# EAGLE board RAUPS (EAGLE 7.2.0)
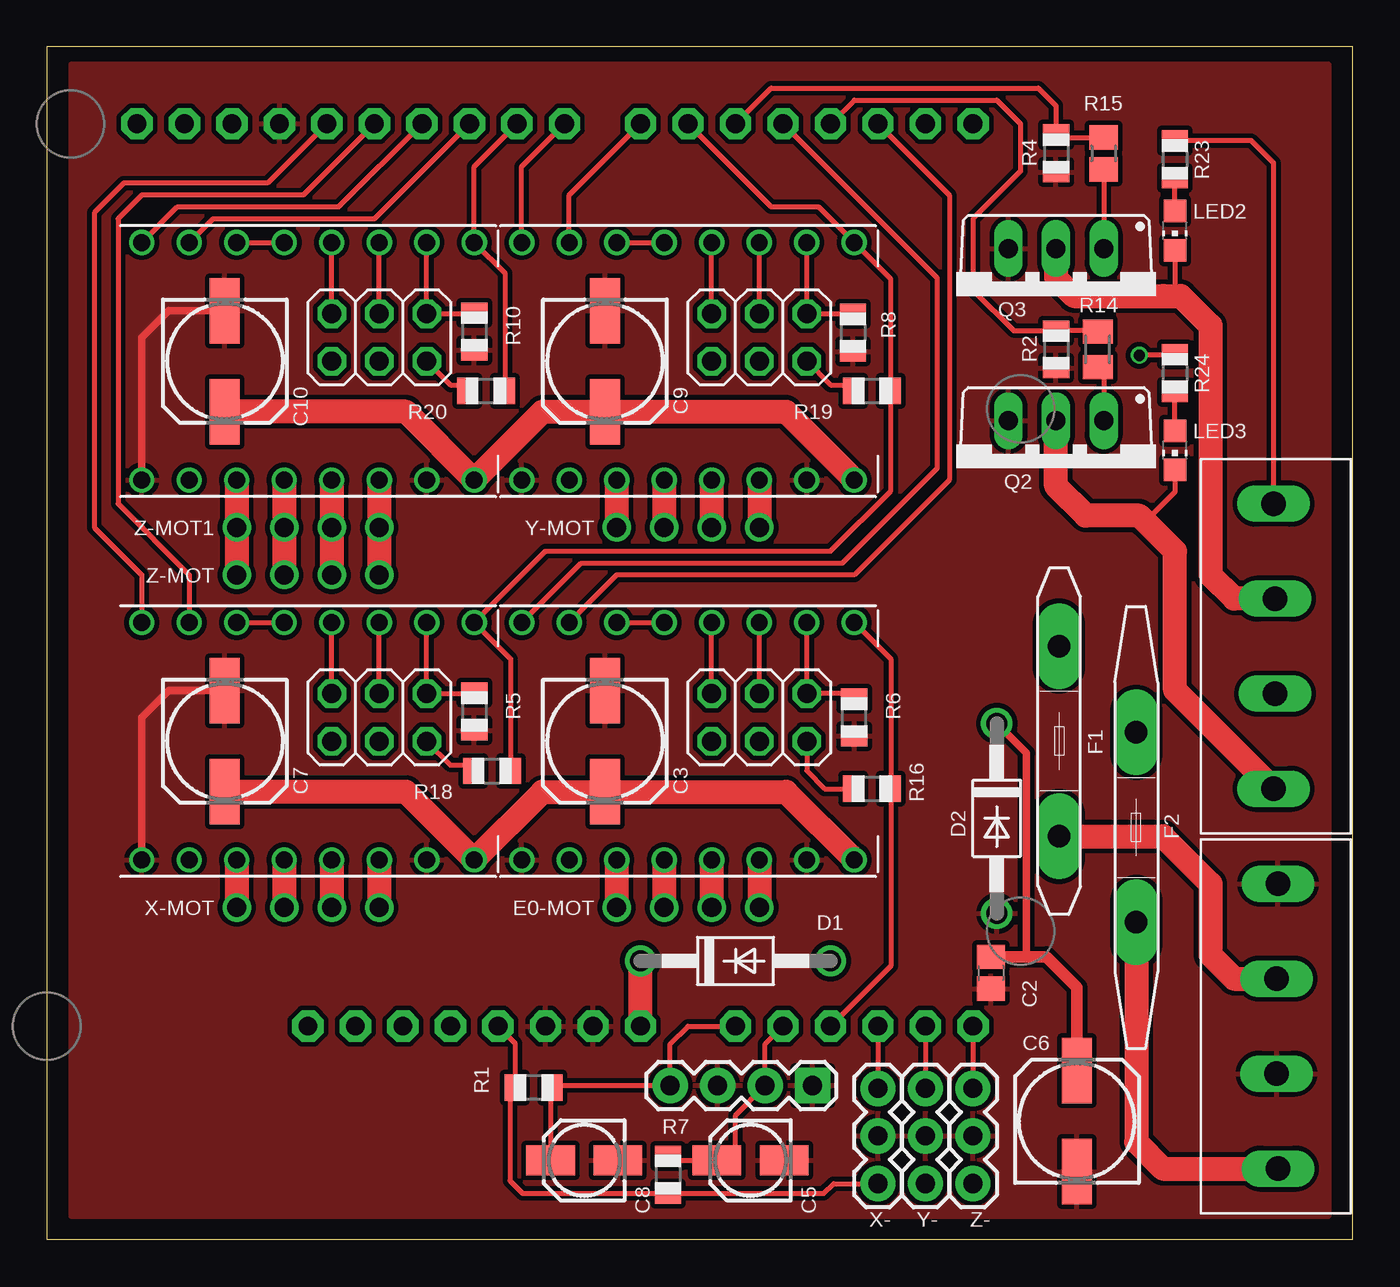
[diagram p0: board, top side]
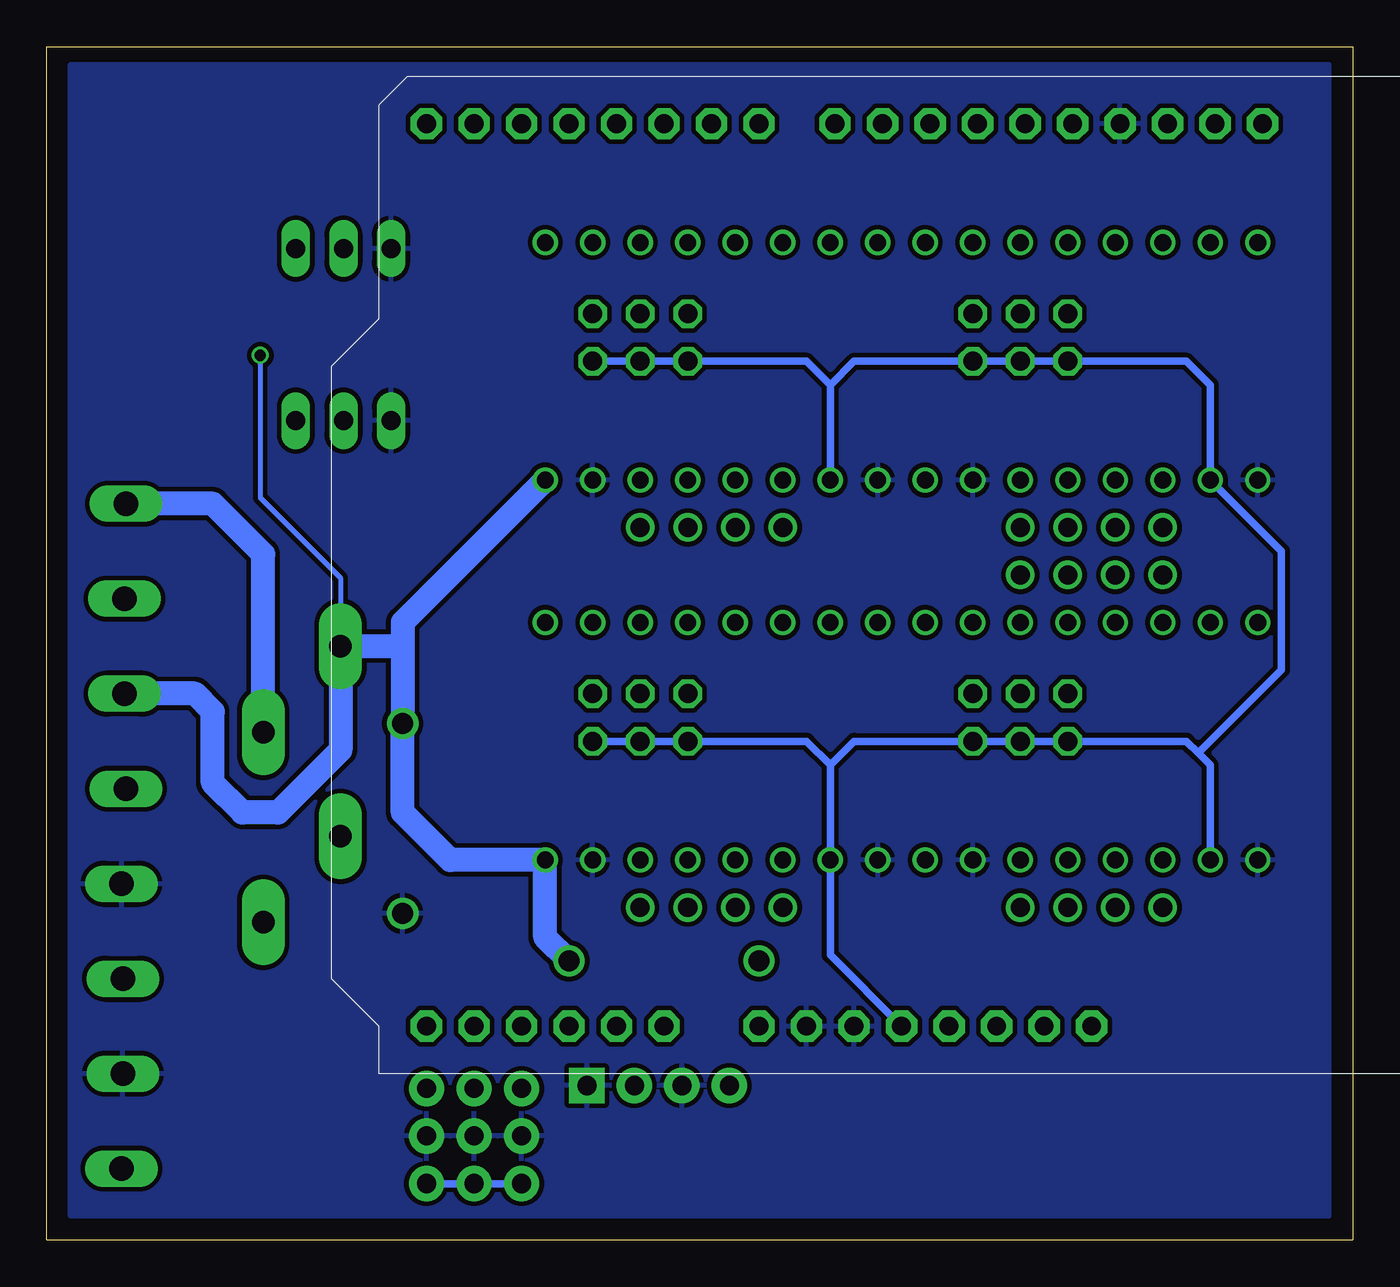
[diagram p1: board, bottom side, seen from below]

Size 69.84 x 63.81 mm. Coordinates in mm from the lower left corner, seen from the top.
Outline: 69.84,0 69.84,63.81 0,63.81 0,0 69.84,0
Copper layers (1*16): Top 0.035mm / dielectric 1.6mm / Bottom 0.035mm
Design rules "Elecrow_2-layer_PCB_eagle_rule": minimum track width 6mil, minimum drill 12mil, track to track 6mil, track to pad 6mil, pad to pad 6mil, via to via 8mil, smd to smd 0mil, copper to edge 20mil, drill to drill 10mil, minimum pad ring 6mil, minimum via ring 6mil, stop-mask expansion 0mil, vias tented up to drill 100mil, thermal gap 10mil

## Footprints (pad centres in the part's own frame; a part is rotated, then mirrored left to right if it is on the bottom)
C0805 = smd 1.3 x 1.5: 1 -0.85,0; 2 0.85,0
153CLV-0605 = smd 3.5 x 1.6: + 2.7,0; - -2.7,0
153CLV-0405 = smd 2.6 x 1.6: + 1.8,0; - -1.8,0
DO41-10 = drill 1.118: A 5.08,0; C -5.08,0
A4988BREAKOUT = drill 0.9: 1A 8.89,1.27; 1B 11.43,1.27; 2A 6.35,1.27; 2B 3.81,1.27; DIR 16.51,-11.43; EN -1.27,-11.43; GND 16.51,1.27; GND@0 1.27,1.27; MS1 1.27,-11.43; MS2 3.81,-11.43; MS3 6.35,-11.43; RST 8.89,-11.43; SLP 11.43,-11.43; STEP 13.97,-11.43; VDD 13.97,1.27; VMOT -1.27,1.27
1X04 = drill 1.016: 1 -2.54,0; 2 0,0; 3 2.54,0; 4 5.08,0
MFR500 = drill 1.2 pad 2.3 long: 1 -5.08,0; 2 5.08,0
MFR1100 = drill 1.2 pad 2.3 long: 1 -5.08,0; 2 5.08,0
1X04' = drill 1.016 pad 1.88 square: 1 0,0 | drill 1.016 pad 1.88: 2 2.54,0; 3 5.08,0; 4 7.62,0
2X03 = drill 1.016 octagon: 1 -2.54,-1.27; 2 -2.54,1.27; 3 0,-1.27; 4 0,1.27; 5 2.54,-1.27; 6 2.54,1.27
CHIP-LED0805 = smd 1.2 x 1.2: A 0,-1.05; C 0,1.05
TO220BV = drill 1.016 long: D 0,-2.54; G -2.54,-2.54; S 2.54,-2.54
R0805 = smd 1.1 x 1.4: 1 -1,0; 2 1,0
M0805 = smd 1.3 x 1.6: 1 -0.95,0; 2 0.95,0
R0805' = smd 1.3 x 1.5: 1 -0.85,0; 2 0.85,0
ARDUINOR3-BPLACE = drill 1 pad 1.676 octagon: 3V 35.56,2.54; 5V 38.1,2.54; A0 50.8,2.54; A1 53.34,2.54; A2 55.88,2.54; A3 58.42,2.54; A4 60.96,2.54; A5 63.5,2.54; AREF 23.876,50.8; D0 63.5,50.8; D1 60.96,50.8; D2 58.42,50.8; D3 55.88,50.8; D4 53.34,50.8; D5 50.8,50.8; D6 48.26,50.8; D7 45.72,50.8; D8 41.656,50.8; D9 39.116,50.8; D10 36.576,50.8; D11 34.036,50.8; D12 31.496,50.8; D13 28.956,50.8; GND 26.416,50.8; GND1 43.18,2.54; GND2 40.64,2.54; IOREF 30.48,2.54; RESERVED 27.94,2.54; RESET 33.02,2.54; SCL 18.796,50.8; SDA 21.336,50.8; VIN 45.72,2.54
CONN-4PIN = drill 1.3 long: P1 -7.62,-0.12; P2 -2.54,-0.04; P3 2.54,-0.04; P4 7.62,-0.12
1X03 = drill 1.016 pad 1.88: 1 0,0; 2 2.54,0; 3 5.08,0

## Placement (x,y rotation side)
C2  100nF  [C0805]  50.48,14.29 270 top
C3  100uF  [153CLV-0605]  29.84,26.67 270 top
C5  10uF  [153CLV-0405]  37.63,4.25 180 top
C6  100uF  [153CLV-0605]  55.09,6.35 90 top
C7  100uF  [153CLV-0605]  9.53,26.67 270 top
C8  10uF  [153CLV-0405]  28.74,4.25 180 top
C9  100uF  [153CLV-0605]  29.84,46.99 270 top
C10  100uF  [153CLV-0605]  9.53,46.99 270 top
D1  1N4004  [DO41-10]  36.83,14.92 0 top
D2  1N4004  [DO41-10]  50.8,22.54 270 top
E0-DRIVE  POLOLU_A4983CARRIER  [A4988BREAKOUT]  41.91,21.59 180 top
E0-MOT  [1X04]  35.56,17.78 180 top
F1  MFR500  [MFR500]  54.13,26.67 270 top
F2  MFR1100  [MFR1100]  58.26,22.07 90 top
JP1  [1X04']  40.96,8.26 180 top
JP2  [2X03]  38.1,27.94 180 top
JP4  [2X03]  17.78,27.94 180 top
JP5  [2X03]  38.1,48.26 180 top
JP6  [2X03]  17.78,48.26 180 top
LED2  [CHIP-LED0805]  60.33,53.98 180 top
LED3  [CHIP-LED0805]  60.33,42.23 180 top
Q2  STP55NF06L  [TO220BV]  53.97,41.27 180 top
Q3  STP55NF06L  [TO220BV]  53.98,50.48 180 top
R1  4.7K  [R0805]  26.04,8.15 180 top
R2  100k  [R0805]  53.98,47.62 270 top
R4  100k  [R0805]  53.98,58.1 270 top
R5  100k  [R0805]  22.86,28.26 270 top
R6  100k  [R0805]  43.18,27.94 90 top
R7  4.7K  [R0805]  33.22,3.49 270 top
R8  100k  [R0805]  43.12,48.51 270 top
R10  100k  [R0805]  22.86,48.58 270 top
R14  10r  [M0805]  56.2,47.62 270 top
R15  10r  [R0805']  56.52,58.1 270 top
R16  10k  [R0805]  44.13,24.13 0 top
R18  10k  [R0805]  23.81,25.08 0 top
R19  10k  [R0805]  44.13,45.4 0 top
R20  10k  [R0805]  23.5,45.4 0 top
R23  1.8K  [R0805]  60.33,57.78 270 top
R24  1.8K  [R0805]  60.33,46.35 270 top
U1  ARDUINOR3-BPLACE  [ARDUINOR3-BPLACE]  -13.97,8.89 0 top
U$1  4PIN_SOCKET  [CONN-4PIN]  65.72,11.43 90 top
U$2  4PIN_SOCKET  [CONN-4PIN]  65.72,31.75 270 top
X-  [1X03]  44.45,8.1 270 top
X-DRIVE  A4988BREAKOUT  [A4988BREAKOUT]  21.59,21.59 180 top
X-MOT  [1X04]  15.24,17.78 180 top
Y-  [1X03]  46.99,8.1 270 top
Y-DRIVE  POLOLU_A4983CARRIER  [A4988BREAKOUT]  41.91,41.91 180 top
Y-MOT  [1X04]  35.56,38.1 180 top
Z-  [1X03]  49.53,8.1 270 top
Z-DRIVE  POLOLU_A4983CARRIER  [A4988BREAKOUT]  21.59,41.91 180 top
Z-MOT  [1X04]  15.24,35.56 180 top
Z-MOT1  [1X04]  15.24,38.1 180 top

## Library data of the parts
C2 R14 R15 = resistor
C3 C5-C10 R1 R2 R4-R8 R10 R16 R18-R20 R23 R24 U1 = adafruit
D1 D2 = diode
E0-DRIVE E0-MOT F1 F2 X-DRIVE X-MOT Y-DRIVE Y-MOT Z-DRIVE Z-MOT Z-MOT1 = RepRapjr
JP1 X- Y- Z- = SparkFun-Connectors
JP2 JP4-JP6 = pinhead
LED2 LED3 = led
Q2 Q3 = transistor-power
U$1 U$2 = ControllerCard

## Nets
3V: U1.3V
+12V: C2.1 C3.+ C6.+ C7.+ C9.+ C10.+ D1.A D2.C E0-DRIVE.VMOT F1.1 R24.1 U$2.P3 X-DRIVE.VMOT Y-DRIVE.VMOT Z-DRIVE.VMOT
+12V2: F2.2 R23.1 U$2.P1
D8: R4.1 R15.1 U1.D5
D9: R2.1 R14.1 U1.D3
E0-DIR: E0-DRIVE.DIR U1.D4
E0-EN: E0-DRIVE.EN R16.2 U1.A2
E0-STEP: E0-DRIVE.STEP U1.D2
GND: C2.2 C3.- C5.- C6.- C7.- C8.- C9.- C10.- D2.A E0-DRIVE.GND E0-DRIVE.GND@0 JP1.1 JP1.3 Q2.S Q3.S R2.2 R4.2 R5.2 R6.1 R8.2 R10.2 U1.GND U1.GND1 U1.GND2 U$1.P2 U$1.P4 X-.2 X-DRIVE.GND X-DRIVE.GND@0 Y-.2 Y-DRIVE.GND Y-DRIVE.GND@0 Z-.2 Z-DRIVE.GND Z-DRIVE.GND@0
N$1: LED3.C Q2.D U$2.P4
N$3: E0-DRIVE.2B E0-MOT.1
N$4: E0-DRIVE.2A E0-MOT.2
N$5: E0-DRIVE.MS1 JP2.1 R6.2
N$6: E0-DRIVE.MS3 JP2.5
N$8: E0-DRIVE.RST E0-DRIVE.SLP
N$9: E0-DRIVE.MS2 JP2.3
N$10: E0-DRIVE.1A E0-MOT.3
N$11: E0-DRIVE.1B E0-MOT.4
N$14: JP4.1 R5.1 X-DRIVE.MS1
N$15: JP4.3 X-DRIVE.MS2
N$17: JP5.3 Y-DRIVE.MS2
N$19: JP4.5 X-DRIVE.MS3
N$20: X-DRIVE.RST X-DRIVE.SLP
N$21: X-DRIVE.2B X-MOT.1
N$22: X-DRIVE.2A X-MOT.2
N$23: Y-DRIVE.RST Y-DRIVE.SLP
N$26: X-DRIVE.1A X-MOT.3
N$27: X-DRIVE.1B X-MOT.4
N$28: Y-DRIVE.2B Y-MOT.1
N$29: Y-DRIVE.2A Y-MOT.2
N$30: Y-DRIVE.1A Y-MOT.3
N$31: JP5.5 Y-DRIVE.MS3
N$32: LED2.A R23.2
N$33: JP5.1 R8.1 Y-DRIVE.MS1
N$36: Y-DRIVE.1B Y-MOT.4
N$37: JP6.3 Z-DRIVE.MS2
N$38: Z-DRIVE.RST Z-DRIVE.SLP
N$39: JP6.5 Z-DRIVE.MS3
N$40: JP6.1 R10.1 Z-DRIVE.MS1
N$41: Z-DRIVE.2B Z-MOT1.1 Z-MOT.1
N$42: Z-DRIVE.2A Z-MOT1.2 Z-MOT.2
N$43: Z-DRIVE.1A Z-MOT1.3 Z-MOT.3
N$44: Z-DRIVE.1B Z-MOT1.4 Z-MOT.4
N$45: LED3.A R24.2
N$47: Q2.G R14.2
N$49: Q3.G R15.2
N$51: LED2.C Q3.D U$2.P2
N$53: F2.1 U$1.P1
N$54: F1.2 U$1.P3
THERM0: C5.+ JP1.2 R7.1 U1.A1
THERM1: C8.+ JP1.4 R1.1 U1.A0
VCC: E0-DRIVE.VDD JP2.2 JP2.4 JP2.6 JP4.2 JP4.4 JP4.6 JP5.2 JP5.4 JP5.6 JP6.2 JP6.4 JP6.6 R1.2 R7.2 R16.1 R18.1 R19.1 R20.1 U1.5V X-.3 X-DRIVE.VDD Y-.3 Y-DRIVE.VDD Z-.3 Z-DRIVE.VDD
VIN: D1.C U1.VIN
X-DIR: U1.D13 X-DRIVE.DIR
X-MIN: U1.A3 X-.1
X-STEP: U1.D12 X-DRIVE.STEP
Y-DIR: U1.D8 Y-DRIVE.DIR
Y-EN: R18.2 R19.2 U1.D6 X-DRIVE.EN Y-DRIVE.EN
Y-MIN: U1.A4 Y-.1
Y-STEP: U1.D7 Y-DRIVE.STEP
Z-DIR: U1.D11 Z-DRIVE.DIR
Z-EN: R20.2 U1.D9 Z-DRIVE.EN
Z-MIN: U1.A5 Z-.1
Z-STEP: U1.D10 Z-DRIVE.STEP

## Tracks (layer width: path | path; a pad name or v marks a point on that pad's centre or on a via)
+12V  (via drill 0.6)
  Top 0.254: R24.1 60.28,47.31 v58.42,47.31
  Top 0.406: C2.1 52.39,15.14 52.39,26.04 D2.C
  Top 0.61: 50.27,14.92 C2.1 53.44,15.14 55.09,13.49 C6.+
  Top 1.27: C7.+ 19.21,23.97 X-DRIVE.VMOT 26.51,23.97 C3.+ 39.53,23.97 E0-DRIVE.VMOT | C10.+ 19.21,44.29 Z-DRIVE.VMOT 26.51,44.29 C9.+ 39.53,44.29 Y-DRIVE.VMOT
  Bottom 0.254: v58.42,47.31 58.42,39.69 54.13,35.4 F1.1
  Bottom 1.27: Y-DRIVE.VMOT 50.8,33.02 50.8,31.75 | 50.8,31.75 D2.C 50.8,22.86 48.26,20.32 E0-DRIVE.VMOT 43.18,16.19 D1.A | 50.8,31.75 F1.1 54.13,26.19 57.47,22.86 59.37,22.86 60.96,24.45 60.96,28.26 61.91,29.21 U$2.P3
+12V2
  Top 0.254: U$2.P1 65.6,57.59 64.41,58.78 R23.1
  Bottom 1.27: F2.2 58.26,36.67 60.96,39.37 U$2.P1
D8
  Top 0.254: R15.1 54.12,58.95 R4.1 53.98,60.64 53.02,61.59 38.73,61.59 U1.D5
D9
  Top 0.254: R14.1 56.15,48.62 R2.1 51.7,48.62 49.53,50.8 49.53,54.61 52.07,57.15 52.07,59.69 50.8,60.96 43.18,60.96 U1.D3
E0-DIR
  Top 0.254: E0-DRIVE.DIR 28.57,36.2 42.55,36.2 47.62,41.27 47.62,51.44 U1.D4
E0-EN
  Top 0.254: E0-DRIVE.EN 45.13,31.07 R16.2 45.13,14.65 U1.A2
E0-STEP
  Top 0.254: U1.D2 48.26,55.88 48.26,40.64 43.18,35.56 30.48,35.56 E0-DRIVE.STEP
GND
  Top 0.406: Z-DRIVE.GND 5.08,48.26 6.51,49.69 C10.- | X-DRIVE.GND | X-DRIVE.GND 5.08,27.94 6.51,29.37 C7.-
  pour Bottom (isolate 0.254): 1.27,1.27 68.58,1.27 68.58,62.87 1.27,62.87
  pour Top (isolate 0.254): 1.27,1.27 68.58,1.27 68.58,62.87 1.27,62.87
N$1
  Top 0.254: LED3.C 60.33,40.01 58.74,38.42
  Top 1.27: U$2.P4 60.33,29.41 60.33,36.83 58.74,38.42 58.42,38.73 55.56,38.73 53.98,40.32 Q2.D
N$3
  Top 1.27: E0-DRIVE.2B E0-MOT.1 | E0-MOT.1
N$4
  Top 1.27: E0-DRIVE.2A E0-MOT.2 | E0-MOT.2
N$5
  Top 0.254: E0-DRIVE.MS1 JP2.1 42.91,29.21 R6.2
N$6
  Top 0.254: JP2.5 E0-DRIVE.MS3
N$8
  Top 0.254: E0-DRIVE.SLP E0-DRIVE.RST
N$9
  Top 0.254: JP2.3 E0-DRIVE.MS2
N$10
  Top 1.27: E0-DRIVE.1A E0-MOT.3 | E0-MOT.3
N$11
  Top 1.27: E0-DRIVE.1B E0-MOT.4 | E0-MOT.4
N$14
  Top 0.254: X-DRIVE.MS1 JP4.1 22.81,29.21 R5.1 | X-DRIVE.MS1
N$15
  Top 0.254: JP4.3 X-DRIVE.MS2 | X-DRIVE.MS2
N$17
  Top 0.254: JP5.3 Y-DRIVE.MS2
N$19
  Top 0.254: JP4.5 X-DRIVE.MS3 | X-DRIVE.MS3
N$20
  Top 0.254: X-DRIVE.SLP X-DRIVE.RST
N$21
  Top 1.27: X-DRIVE.2B 17.78,19.05 | 17.78,19.05 | 17.78,19.05 X-MOT.1
N$22
  Top 1.27: X-DRIVE.2A X-MOT.2 | X-MOT.2
N$23
  Top 0.254: Y-DRIVE.SLP Y-DRIVE.RST
N$26
  Top 1.27: X-DRIVE.1A X-MOT.3 | X-MOT.3
N$27
  Top 1.27: X-DRIVE.1B X-MOT.4 | X-MOT.4
N$28
  Top 1.27: Y-DRIVE.2B Y-MOT.1
N$29
  Top 1.27: Y-DRIVE.2A Y-MOT.2
N$30
  Top 1.27: Y-DRIVE.1A Y-MOT.3
N$31
  Top 0.254: JP5.5 Y-DRIVE.MS3
N$32
  Top 0.254: LED2.A R23.2
N$33
  Top 0.254: Y-DRIVE.MS1 JP5.1 43.1,49.53 arc-90 R8.1
N$36
  Top 1.27: Y-DRIVE.1B Y-MOT.4
N$37
  Top 0.254: JP6.3 Z-DRIVE.MS2
N$38
  Top 0.254: Z-DRIVE.SLP Z-DRIVE.RST
N$39
  Top 0.254: JP6.5 Z-DRIVE.MS3
N$40
  Top 0.254: Z-DRIVE.MS1 JP6.1 22.81,49.53 arc90 R10.1
N$41
  Top 1.27: Z-DRIVE.2B Z-MOT1.1 Z-MOT.1
N$42
  Top 1.27: Z-DRIVE.2A Z-MOT1.2 Z-MOT.2
N$43
  Top 1.27: Z-DRIVE.1A Z-MOT1.3 Z-MOT.3
N$44
  Top 1.27: Z-DRIVE.1B Z-MOT1.4 Z-MOT.4
N$45
  Top 0.254: LED3.A R24.2
N$47
  Top 0.254: R14.2 56.52,46.36 Q2.G
N$49
  Top 0.254: R15.2 Q3.G
N$51
  Top 0.254: LED2.C 60.33,50.48 59.69,50.48
  Top 1.27: U$2.P2 63.5,34.29 62.23,35.56 62.23,48.9 60.64,50.48 59.69,50.48 54.93,50.48 53.98,51.44 Q3.D
N$53
  Top 1.27: F2.1 58.26,5.24 59.69,3.81 U$1.P1
N$54
  Top 1.27: F1.2 59.69,21.59 62.23,19.05 62.23,15.24 63.5,13.97 U$1.P3
THERM0
  Top 0.254: R7.1 33.22,4.25 C5.+ 36.83,4.25 36.83,6.67 JP1.2 38.42,10.48 U1.A1
THERM1
  Top 0.254: C8.+ 26.94,8.15 R1.1 27.04,8.26 JP1.4 33.34,10.48 34.29,11.43 U1.A0
VCC
  Top 0.254: JP2.2 40.64,25.08 41.59,24.13 R16.1 | U1.5V 25.04,10.53 R1.2 24.77,7.88 24.77,3.17 25.45,2.49 R7.2 41.55,2.49 42.07,3.02 X-.3 | JP4.2 21.59,25.4 22.5,25.4 R18.1 | JP6.2 21.59,45.72 22.18,45.72 R20.1 | JP5.2 41.91,45.72 42.81,45.72 R19.1
  Bottom 0.406: Y-DRIVE.VDD 27.94,45.72 | 27.94,45.72 29.21,46.99 JP5.6 JP5.4 JP5.2 | X-DRIVE.VDD | X-DRIVE.VDD 7.62,25.4 8.26,26.04 | 8.26,26.04 8.89,26.67 JP4.6 JP4.4 JP4.2 26.67,26.67 27.94,25.4 | 27.94,25.4 E0-DRIVE.VDD 27.94,15.24 U1.5V | 27.94,25.4 29.21,26.67 JP2.6 JP2.4 JP2.2 | X-.3 Y-.3 Z-.3 | 27.94,45.72 26.67,46.99 JP6.2 JP6.4 JP6.6 8.89,46.99 7.62,45.72 Z-DRIVE.VDD 3.81,36.83 3.81,30.48 8.26,26.04
VIN
  Top 1.27: U1.VIN D1.C
X-DIR
  Top 0.254: U1.D13 11.81,56.52 4.13,56.52 2.54,54.93 2.54,38.1 5.08,35.56 X-DRIVE.DIR
X-MIN
  Top 0.254: U1.A3 X-.1
X-STEP
  Top 0.254: U1.D12 13.72,55.88 5.08,55.88 3.81,54.61 3.81,39.37 7.62,35.56 X-DRIVE.STEP
Y-DIR
  Top 0.254: Y-DRIVE.DIR 25.4,57.4 U1.D8
Y-EN
  Top 0.254: U1.D6 38.73,55.24 41.27,55.24 Y-DRIVE.EN 45.13,51.39 R19.2 45.13,40.05 41.91,36.83 26.67,36.83 X-DRIVE.EN 24.81,31.07 R18.2
Y-MIN
  Top 0.254: U1.A4 Y-.1
Y-STEP
  Top 0.254: Y-DRIVE.STEP 27.94,55.88 U1.D7
Z-DIR
  Top 0.254: Z-DRIVE.DIR 6.99,55.24 15.62,55.24 U1.D11
Z-EN
  Top 0.254: U1.D9 22.86,57.4 Z-DRIVE.EN 24.5,51.7 R20.2
Z-MIN
  Top 0.254: U1.A5 Z-.1
Z-STEP
  Top 0.254: Z-DRIVE.STEP 8.89,54.61 17.53,54.61 U1.D10